# Altium PCB MCU_PCB_v2.PcbDoc (part 2 of 2)
Units mil, origin at the board's own origin, x right, y up, seen from the top; angles counter-clockwise.
Board outline 1770 x 325 mil, 4 copper layers (Top Layer, Layer 1, Layer 2, Bottom Layer), stack 31.384 mil thick; 67 components, 55 nets, 243 pads, 130 vias.
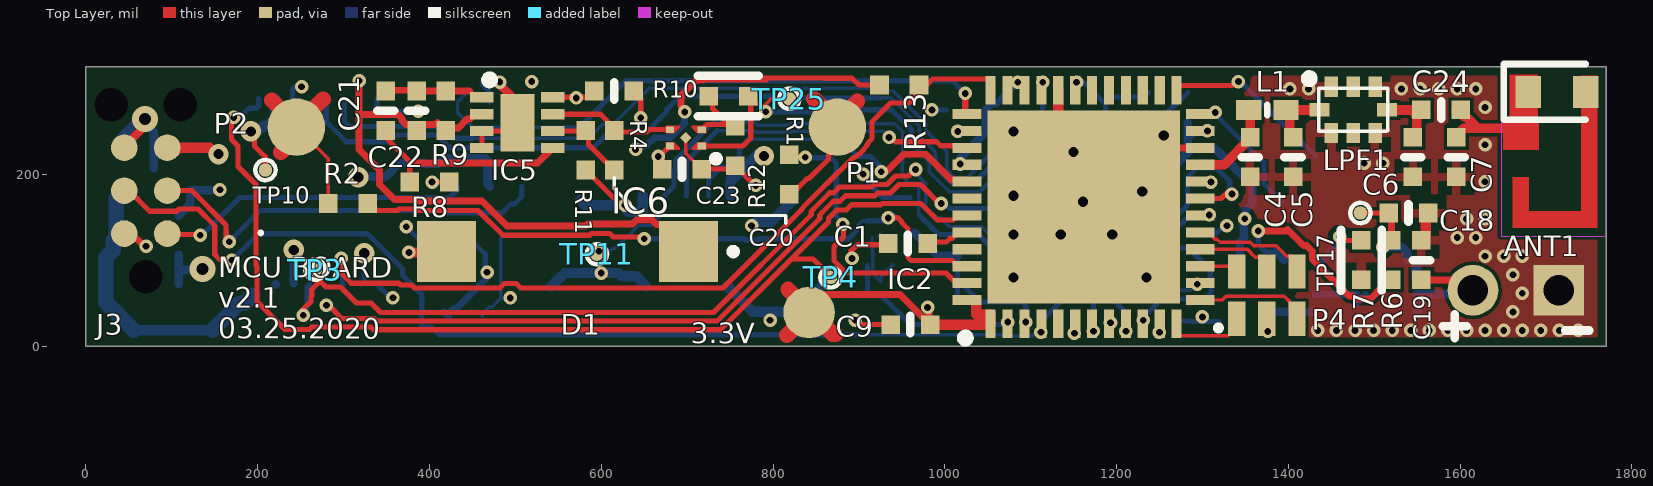
[diagram p0: Top Layer view]

## Via types
v1: diameter 15.75, hole 7.87, Top Layer to Bottom Layer, tented both sides, 111 vias
v2: diameter 23.62, hole 11.81, Top Layer to Bottom Layer, tented bottom, 11 vias
v3: diameter 23.62, hole 11.81, Top Layer to Bottom Layer, tented both sides, 6 vias
v4: diameter 30, hole 13.94, Top Layer to Bottom Layer, tented both sides, 2 vias

## Nets (pads, with @x,y where several pads share a name; then routed paths per layer and width w, separated by ;. In a path a pad name is that pad's centre, name@x,y a point inside that pad or via, vN(x,y) a via of type N, cw(c..) or ccw(c..) an arc to the next point about the centre after c; other vN are vias at no path point) (continued)
NetC5_2: (continued)
  Top Layer w12: L1.2 L1.2@1401.68,270.6 ; C5.2@1401.68,246.95 C5.2
NetC6_2: C6.2 C24.2 LPF1.4 | length 74.7
  Top Layer w11.3: LPF1.4 C24.2@1549.49,275 ; C24.2@1548.49,275 C24.2@1552.98,275 ; C6.2@1549.49,247.49 C24.2@1549.49,270.51
  Top Layer w12: C6.2 C6.2@1549.49,247.49 ; C24.2@1548.49,269.51 C24.2@1552.98,274
NetC21_2: C21.2 IC5.5 R8.1 | length 254.4
  Top Layer w6: C21.2 349,243 377,215 ; R8.1 377,215 ; 379,213 377,215
  Top Layer w8: 379,213 526.05,213 IC5.5@540.52,227.48 ; 534.86,221.82 IC5.5
NetIC1_4: IC1.4 J3.3 | length 482.9
  Top Layer w6: J3.3 123.14,181 163,141.14 163,134.39 163.25,134.14 163.25,124.93 v1(166.78,121.41)
  Bottom Layer w6: v1(166.78,121.41) 166.78,121.78 203,158 415.05,158 417.89,155.17 484.71,155.17 494.71,165.17 498.59,165.17 507.4,173.98 IC1.4
NetIC1_6: IC1.6 J3.1 | length 364.5
  Top Layer w6: J3.1 95.66,130 132.22,130 v1(133.12,129.09)
  Bottom Layer w6: v1(133.12,129.09) 134.03,130 136,130 179,173 423.79,173 432.6,181.81 IC1.6
NetIC2_5: IC2.5 | length 8.2
  Top Layer w4: IC2.5@1132,18 1132,24 1132.2,24.2 IC2.5
NetIC4_5: IC4.5 LED1.1 | length 45.5
  Bottom Layer w10: LED1.1@1385,40 IC4.5@1430.47,40
NetIC4_8: IC4.8 R7.2 | length 80.4
  Top Layer w6: v1(1459.69,127.43) 1459.69,126.51 1463.2,123 R7.2
  Bottom Layer w8: IC4.8@1439.53,99.53 1460.48,120.48 1460.48,126.64 v1(1459.69,127.43)
  Bottom Layer w10: IC4.8 IC4.8@1439.53,99.53 ; v1(1459.69,127.43) 1460.48,126.64 v1@1460.48,120.48
NetIC5_7: IC5.7 IC6.4 R4.1 | length 147.8
  Top Layer w6: IC5.7 599,270 607.17,261.83 607.17,258.83 R4.1 616.78,249.22 652.95,249.22 655.74,252.01 655.99,252.01 IC6.4
NetIC6_2: IC6.2 R10.2 R12.2 | length 76.5
  Top Layer w6: IC6.2 717.79,252 719.72,253.94 719.72,254.72 723,258 748,258 729.48,276.52 729.48,286.52 R10.2
NetLED1_2: LED1.2 R6.1 | length 259.4
  Top Layer w8: v1(1365,134) 1397,134 1399,136 1418,117 1421.14,117 1428,110.14 1428,101.03 1470.86,58.17 1475.48,58.17 1478.66,55 1495.97,55 1503.83,62.86 1503.83,63.83 1510.17,70.17 1513.17,70.17 1515,72 1515,75 1517,77 R6.1
  Bottom Layer w6: v1(1365,134) 1365,118.22 1373.56,109.66 LED1.2@1385.61,109.66
  Bottom Layer w10: LED1.2@1385.61,109.66 LED1.2@1395,100.28
NetP1_1: P1.1 R1.2 | length 172.3
  Top Layer w6: R1.2@822,177 840,195 842,195 864.47,217.47 864.47,244.47 P1.1
  Top Layer w18: 847.45,288 P1.1@872.61,262.84 ; P1.1@873,260.08 898.16,285.24
NetP2_1: P2.1 R2.2 | length 202.1
  Top Layer w4: P2.1 282,218 R2.2@282,175
  Top Layer w18: 216.45,286 P2.1@241.61,260.84 ; 227,225.45 P2.1@252.16,250.61 ; P2.1@251,262.45 276.16,287.61
NRST: C12.1 IC2.7 J2.4 TP11.1 | length 867.1
  Bottom Layer w4: v1(597.37,110.45) 609.65,110.45 612.28,113.09 615.77,113.09 643.46,140.78 658.3,140.78 673.82,156.3 J2.4 ; 730,260 779.41,260 782.47,256.94 818.08,256.94 819.92,258.78 941.69,258.78 951.17,249.29 951.17,213.05 950.27,212.14 950.27,197.73 958.17,189.83 961.83,189.83 966.31,189.83 969.83,186.31 969.83,153.17 970.98,152.02
  Bottom Layer w6: J2.4 684.54,185.72 684.54,204.47 686.72,206.66 686.72,216.72 730,260 ; 970.98,152.02 993,130 1039.23,130 1055,114.23 1055,75 1064.49,65.51 1067.89,65.51 1072.21,61.19 1087.79,61.19 1092.11,65.51 1110.51,65.51 1114.83,69.83 1152.17,69.83 C12.1 1173.11,48.89 v1(1173.11,17.28)
PA2: IC2.11 P4.2 | length 138.4
  Top Layer w4: P4.2@1367,13.83 P4.2@1375,21.83
  Layer 2 w6: v1(1250,16) 1268,16 1291.4,16 1292.22,15.18 1307.78,15.18 1308.6,16 1375,16 v1(1376,17)
PA3: IC2.12 P4.1 | length 96.1
  Top Layer w4: IC2.12 1270,15.75 1273.91,11.84 1330.01,11.84 1340,21.83 P4.1
PA4: IC2.13 P4.3 | length 132.5
  Top Layer w4: IC2.13 1323.33,53.64 1327.51,57.83 1395.47,57.83 1402,51.3 1402,37 P4.3@1408.63,30.37
PA6: IC2.15 P4.6 | length 46.8
  Top Layer w4: IC2.15 1332,93.01 1340,85.01 P4.6@1340,84
PA7: IC2.16 P4.5 | length 90.8
  Top Layer w4: IC2.16 1297.69,112.83 1352.49,112.83 1356,109.31 1356,108.66 1361.34,103.31 1367,103.31 1375,95.31 P4.5@1375,89.66
PA8: IC2.17 P4.4 | length 135.2
  Top Layer w4: IC2.17 1308.39,132.38 1312.29,128.48 1312.29,126.95 1314.63,124.6 1316.78,124.6 1320.55,120.83 1355.8,120.83 1359.63,117 1386.14,117 1398.31,104.83 1402,104.83 1410,96.83 P4.4@1410,89.66
RCC_OSC32_IN: C2.1 IC2.2 Y1.1 | length 299.7
  Bottom Layer w4: C2.1 915.25,111.75 916,111 916,84.79 Y1.1 925.79,80.79 Y1.1@940,95 ; C2.1@922.25,127 C2.1@925.25,130
  Bottom Layer w6: Y1.1@910,93.92 910,60 925,60 960,25 1065.61,25 1065.75,25.13 1072.13,25.13 v1@1074,27
  other v1: 1073.4,28
RCC_OSC32_OUT: C3.1 IC2.3 Y1.2 | length 216.3
  Bottom Layer w6: Y1.2@1015,55.95 Y1.2@1015,105 ; Y1.2 1024.21,67.87 1040.9,51.19 1090.86,51.19 1094.37,47.67 v1@1094.37,27.28
  Bottom Layer w10: 965,132 992,105 Y1.2@1015,105
  other v1: 1094.37,28
RCC_OSC_IN: IC2.25 Y2.3 | length 205.8
  Top Layer w6: IC2.25 1270,303 1270.61,303.61 1334.97,303.61 1339.36,308 v1(1342,308)
  Bottom Layer w6: v1(1342,308) 1344.26,308 1419.92,232.34 1420.91,232.34 1431.68,221.56 Y2.3
RCC_OSC_OUT: IC2.24 Y2.1 | length 157.5
  Top Layer w6: IC2.24 1314.82,270.18 1315.83,271.18 1316.02,271 1315.75,270.73 1315,271.48 v1(1315,272)
  Bottom Layer w6: v1(1315,272) 1315,270 1371.54,213.46 1371.54,189.19 1392.32,168.41 Y2.1
RF_OUT: C4.1 IC2.21 L1.1 | length 100.7
  Top Layer w11.3: IC2.21 1325.12,211.12 1332,218 C4.1@1350.8,236.8 ; C4.1 L1.1@1355.63,271.65
  Top Layer w12: C4.1@1350.8,236.8 1350.8,238.17 C4.1
SYS_SWCLK: IC2.41 J2.2 | length 390.2
  Top Layer w8: v1(926,203) 932,203 938,209 ; 935.52,206.48 952.43,223.39 977.61,223.39 1007.66,193.34 1024,193.34 IC2.41
  Bottom Layer w4: 769,239.46 770.48,240.94 824.71,240.94 824.77,241 879,241
  Bottom Layer w6: J2.2 725,195 726.3,195 735.72,204.42 735.72,204.47 739.82,208.57 748.57,208.57 761,221 761,230 769,238 769,239.46 ; 879,241 899.28,220.72 913.58,220.72 925.72,208.58 925.72,203.28 v1(926,203)
SYS_SWDIO: IC2.39 J2.3 | length 390.7
  Top Layer w6: v1(935.15,243) 937.79,243 942.79,238 990.47,238 995.24,233.22 1023.49,233.22 IC2.39
  Bottom Layer w4: 735,250.86 777.24,250.86 779.16,248.94 821.39,248.94 822.45,250 928.15,250 v1(935.15,243)
  Bottom Layer w6: J2.3 699.41,215.27 735,250.86
TRANS_IMP_OUT: C21.1 C22.1 IC5.1 R9.1 | length 116.3
  Top Layer w6: 446.71,297 450.22,293.49 450.22,292.59 453.13,289.69 IC5.1
  Top Layer w8: C21.1 349.91,297.91 384.09,297.91 C22.1 R9.1 446.71,297
TSC_G2_IO1: C1.1 IC2.44 | length 48.7
  Top Layer w6: C1.1@982.11,121 1001.67,121 1006.27,125.6 1008.66,125.6 1012.17,129.12 1012.17,129.48 1015.08,132.38 IC2.44
TSC_G2_IO2: IC2.45
TSC_G2_IO3: IC2.46 R2.1 | length 790.7
  Top Layer w6: R2.1 335.83,158.17 339.17,158.17 339.34,158 362.7,158 364.42,159.72 381.58,159.72 383.3,158 456.44,158 485.44,129 586.62,129 588.79,131.17 609.86,131.17 614.03,127 641.61,127 641.75,126.87 648.13,126.87 v1(650,125) ; v1(934.13,149.27) 934.22,149.36 945.48,149.36 949.83,145.01 949.83,143.73 957,136.55 957,103.31 960.52,99.79 1008.66,99.79 1012.17,96.28 1012.17,95.92 1015.08,93.01 IC2.46
  Bottom Layer w4: 897.42,136.51 898.42,137.51 898.42,140.31 903.99,145.87 909.13,145.87
  Bottom Layer w6: v1(650,125) 766.27,125 768.05,123.22 781.95,123.22 783.73,125 888.25,125 897.42,134.17 897.42,136.51 ; 909.13,145.87 933.58,145.87 v1@939.97,152.27 ; v1(934.13,149.27) 937.03,149.27 v1@940,152.24
TSC_G2_IO4: IC2.47 R1.1 | length 350.3
  Top Layer w6: R1.1 819,220.57 822.59,216.98 825.57,219.96 v1(837.66,219.96) ; v1(881.3,141.78) 882,141.08 882,127 870.86,115.86 870.86,99.41 885.27,85 1001.38,85 1013.05,73.33 IC2.47
  Bottom Layer w6: v1(837.66,219.96) 838.33,219.29 867.46,219.29 873.73,213.02 873.73,151.27 881.3,143.7 v1(881.3,141.78)
USB_DN: IC1.1 IC2.37 | length 684.4
  Top Layer w4: v1@1018.5,295 1019.28,294.22 v1(1023.92,294.22)
  Top Layer w8: v1(1023.92,294.22) 1023.92,274.05 1025,272.97 1024.06,272.03 IC2.37
  Bottom Layer w4: IC1.1@442.41,294.02 IC1.1 432.6,272.4 442.41,262.59 442.66,262.59 450.66,254.59 574.59,254.59 ; v1@1023.45,294.7 v1(1023.92,294.22)
  Bottom Layer w6: 574.59,254.59 628.97,308.97 1009.03,308.97 1023.3,294.7 v1@1023.45,294.7
USB_DP: IC1.3 IC2.38 | length 524.7
  Top Layer w4: IC2.38@1012.25,252.75 v1(1015,250)
  Layer 2 w6: v1(519,308) 614,308 618,304 619,305 917,305 972,250 1001.5,250 v1(1015,250)
VBAT_1: C19.1 IC4.3 IC4.4 J1.14 P3.2 TP10.1 | length 630.6
  Top Layer w6: v3(192,250) 194,250 196.22,247.78 196.22,232.78 205,224 209,220 TP10.1
  Top Layer w8: C19.1 1589.18,77 1601.18,65 P3.2
  Layer 1 w10: 365,275.13 365,275.86 373,283.86 373,284
  Layer 1 w12: 192,278 195,281 193,283
  Layer 1 w16: v3(192,250) 193.87,251.87 193.87,275.23 192,277.11 192,278
  Layer 1 w40: 1365.5,283.5 1436.09,212.91 1436.09,206.76 1449.84,193.02 1521.29,153.56 1528.03,146.81 1609.84,65 P3.2
  Bottom Layer w10: IC4.3 P3.2@1586.88,60.16 ; IC4.4@1550,40 IC4.3@1550,55.08 ; P3.2@1601.73,65 P3.2
  Bottom Layer w12: v3(192,250) 193.14,250 195.14,252 198.14,249 203.96,254.81 205.81,254.81 207.61,256.61 211.15,256.61 220.79,266.25 J1.14
VBAT_MUX: C16.1 IC3.1 J1.15 | length 327.8
  Bottom Layer w12: 55.53,18.5 108,18.5 147.5,18.5
  Bottom Layer w18: 35.39,172.41 35.39,127.39 31.5,123.5 31.5,111.5 23,103 23,51.03 55.53,18.5 ; 147.5,18.5 179,50 185,50 194,59
VDDA/VREF: C10.1 FB1.1 IC2.8 | length 182.3
  Layer 2 w10: v1(1193,27.28) 1216.72,51 1282.96,51 v1(1300,33.96)
  Bottom Layer w6: C10.1@1268.91,33.09 1272.83,29.17 1286.55,29.17 1287.22,28.5 v1@1300,28.5 ; v1(1300,33.96) v1@1300,28.5 ; FB1.1@1320,28.5 v1@1300,28.5
VFBSMPS: C8.1 IC2.31 L3.2 | length 133.3
  Bottom Layer w6: v1(1153.43,307.28) 1161.69,307.28 L3.2@1186.99,281.99 ; L3.2@1170.43,255 1186.99,271.56 L3.2@1186.99,281.99 ; C8.1 1232,290 1195,290 L3.2@1186.99,281.99
VLXSMPS: IC2.33 L3.1 | length 59.1
  Bottom Layer w6: L3.1@1099.57,255 1114.03,269.46 1114.03,289.03 1115,290 1115,306.34 v1(1114.06,307.28)
pads on no net: ANT1.2 IC2.26 IC2.27 IC2.28 IC2.29 IC2.30 IC2.42 IC3.2 IC3.4 IC3.5 IC4.7 J1.13 J3.7 J3.8 J3.9 LPF1.2 LPF1.6 Y2.2 Y2.4
copper on no net: | length 0.6
  Bottom Layer w10: 220.39,72.13 220.79,71.73

## Polygon pours and split planes (outlines as drawn)
GND on Top Layer "Top Layer-GND" (solid, pour order 12): 1290,318.9 1290,310 1290,5 1765,5 1765,317.2 1763.31,318.9
no net on Top Layer "Top Layer-No Net" (solid, pour order 0): 0,325
3.3V_MCU on Layer 1 "Layer 1-3.3V_MCU" (solid, pour order 8): 15,195 1275.24,195 1365,156.26 1365,10 15,10
VBAT_1 on Layer 1 "Layer 1-VBAT_1" (solid, pour order 4): 15,320 15,270 1360,270 1360,320
5V on Layer 1 "Layer 1-5V 1" (solid, pour order 18): 1083,227 1120,264 1221,264 1258,227
5V on Layer 1 "Layer 1-5V" (solid, pour order 6): 1520,100 1520,130 1450,130 1321,259 15,259 15,205 1319,205 1424,100
5V on Layer 1 "Layer 1-5V 1" (solid, pour order 16): 880,220 900,240 1035,240 1055,220
no net on Layer 1 "Layer 1-No Net" (solid, pour order 10): 652.5,205
GND on Layer 2 "Layer 2-GND" (solid, pour order 2): 5,320 5,5 1763.31,5 1763.31,320
GND on Bottom Layer "Bottom Layer-GND" (solid, pour order 14): 1290,318.9 1290,310 1290,5 1765,5 1765,317.2 1763.31,318.9

## Keep-outs
Keep-Out Layer:
  region: 1770,325 1647.83,325 1647.83,128.15 1770,128.15

## Other copper
Top Layer:
  region net NetANT1_1: 1691,316 1657.54,316 1657.54,228.2 1691,228.2
  region net NetANT1_1: 1692,259.7 1650,259.7 1650,228.2 1692,228.2
  region: 1759.31,157.42 1660.88,157.42 1660.88,137.73 1759.31,137.73
  region: 1760.31,314.9 1740.62,314.9 1740.62,137.73 1760.31,137.73
  region: 1680.57,196.79 1660.88,196.79 1660.88,137.73 1680.57,137.73
  region: 868,-90

## Silkscreen, mask and mechanical layers (free items; w line width, h text height)
Top Overlay:
  lines w3.94: 615,196 615,183 646,152 785,152 815,152 815,143
  lines w10: 1580,23 1608,23 ; 1594,9 1594,37 ; 1722.4,18.16 1750.4,18.16
  text "MCU BOARD  / v2.1 / 03.25.2020" at 154,9 h23.62 r359.79
  text "3.3V" at 704,3 h23.62 r359.79
Bottom Overlay:
  lines w10: 1568,27 1596,27 ; 1582,13 1582,41 ; 1723,22 1751,22
  text "PATRICK CHWALEK / DAVID RAMSAY" at 897,232 h23.62 r359.79
Mechanical BS:
  the board outline again, w0.5